# Altium PCB board_layout.PcbDoc
Units mil, origin at the board's own origin, x right, y up, seen from the top; angles counter-clockwise.
Board outline 2552.03 x 2874.03 mil, 2 copper layers (Top Layer, Bottom Layer); 11 components, 12 nets, 66 pads, 5 vias.
Unrouted connection lines stored in the file: 3.
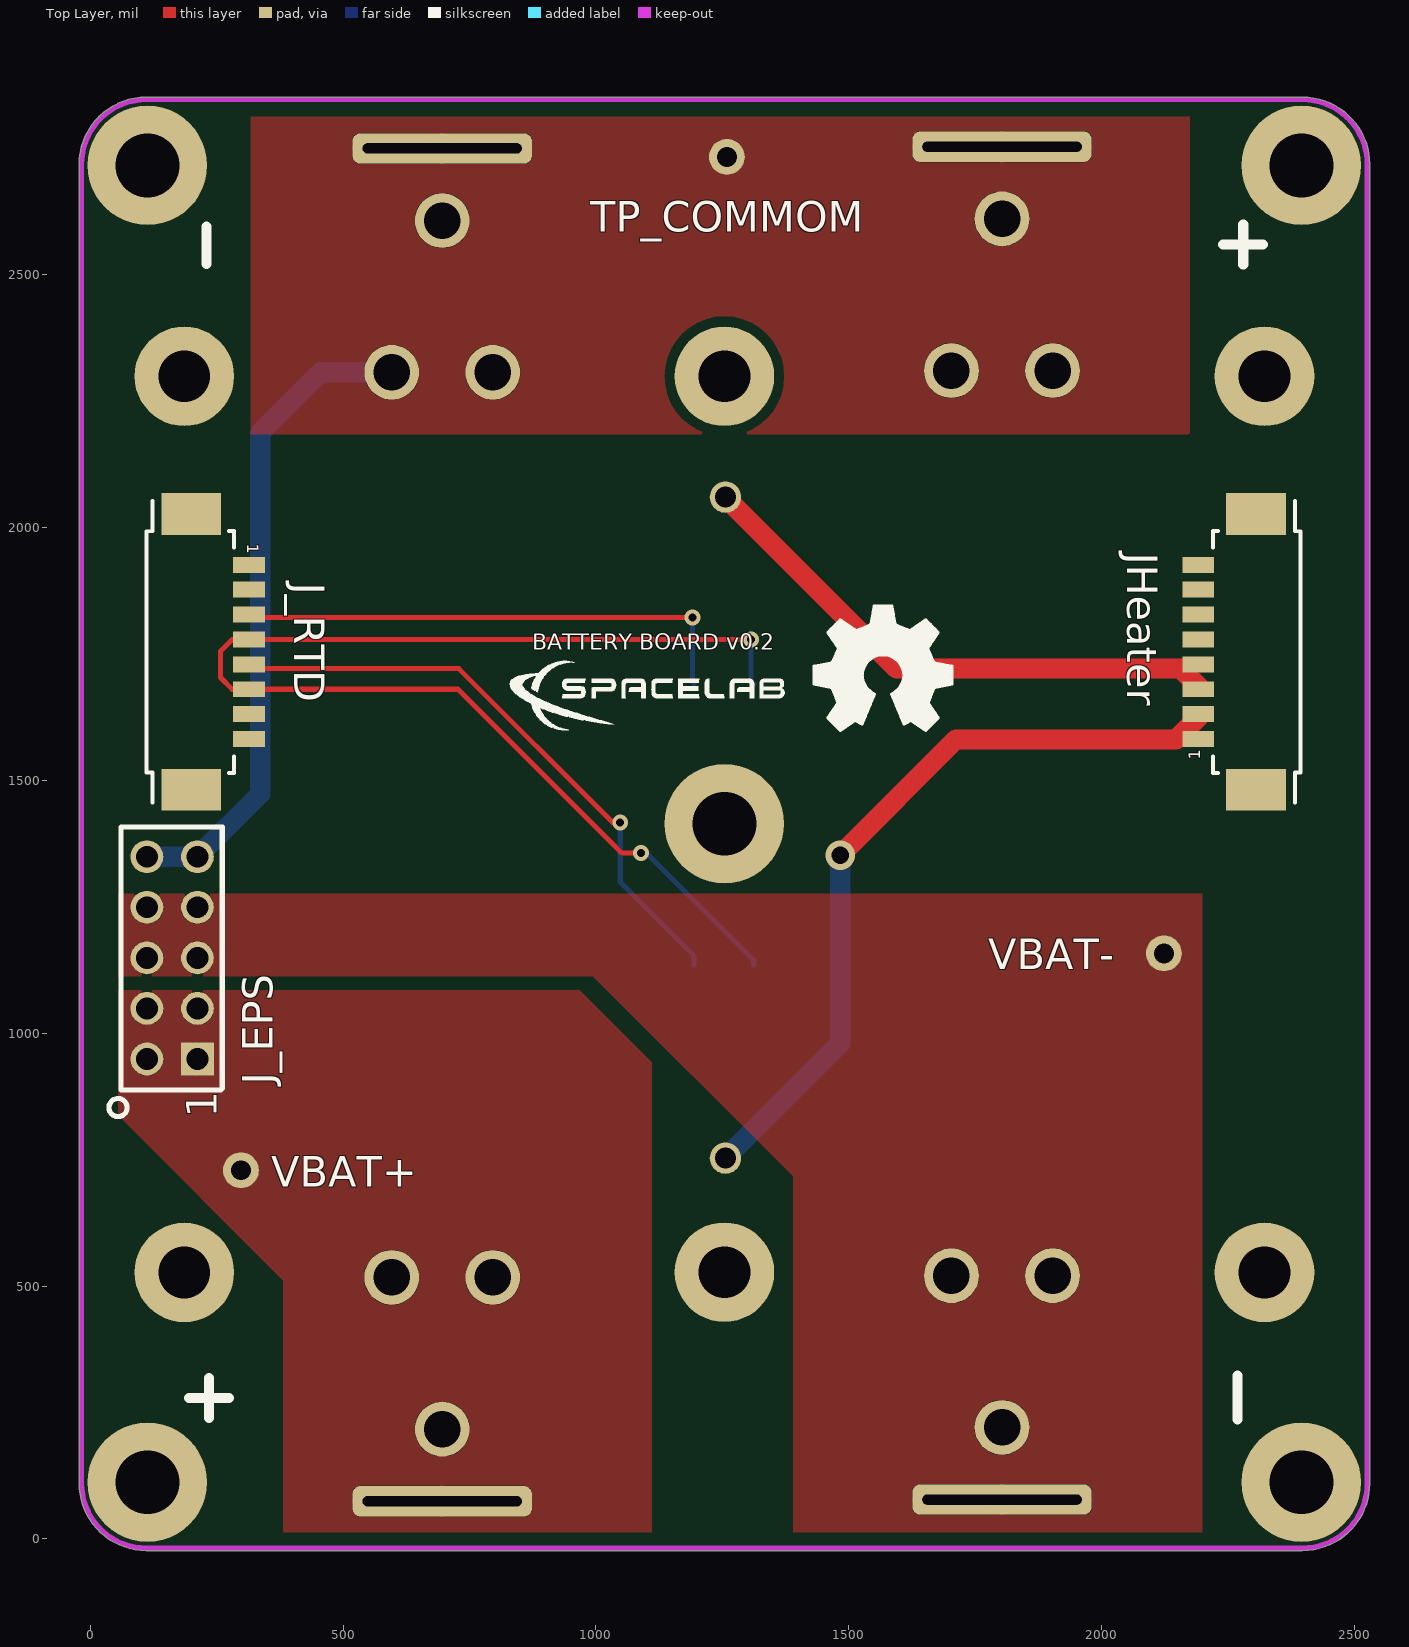
[diagram p0: Top Layer view]
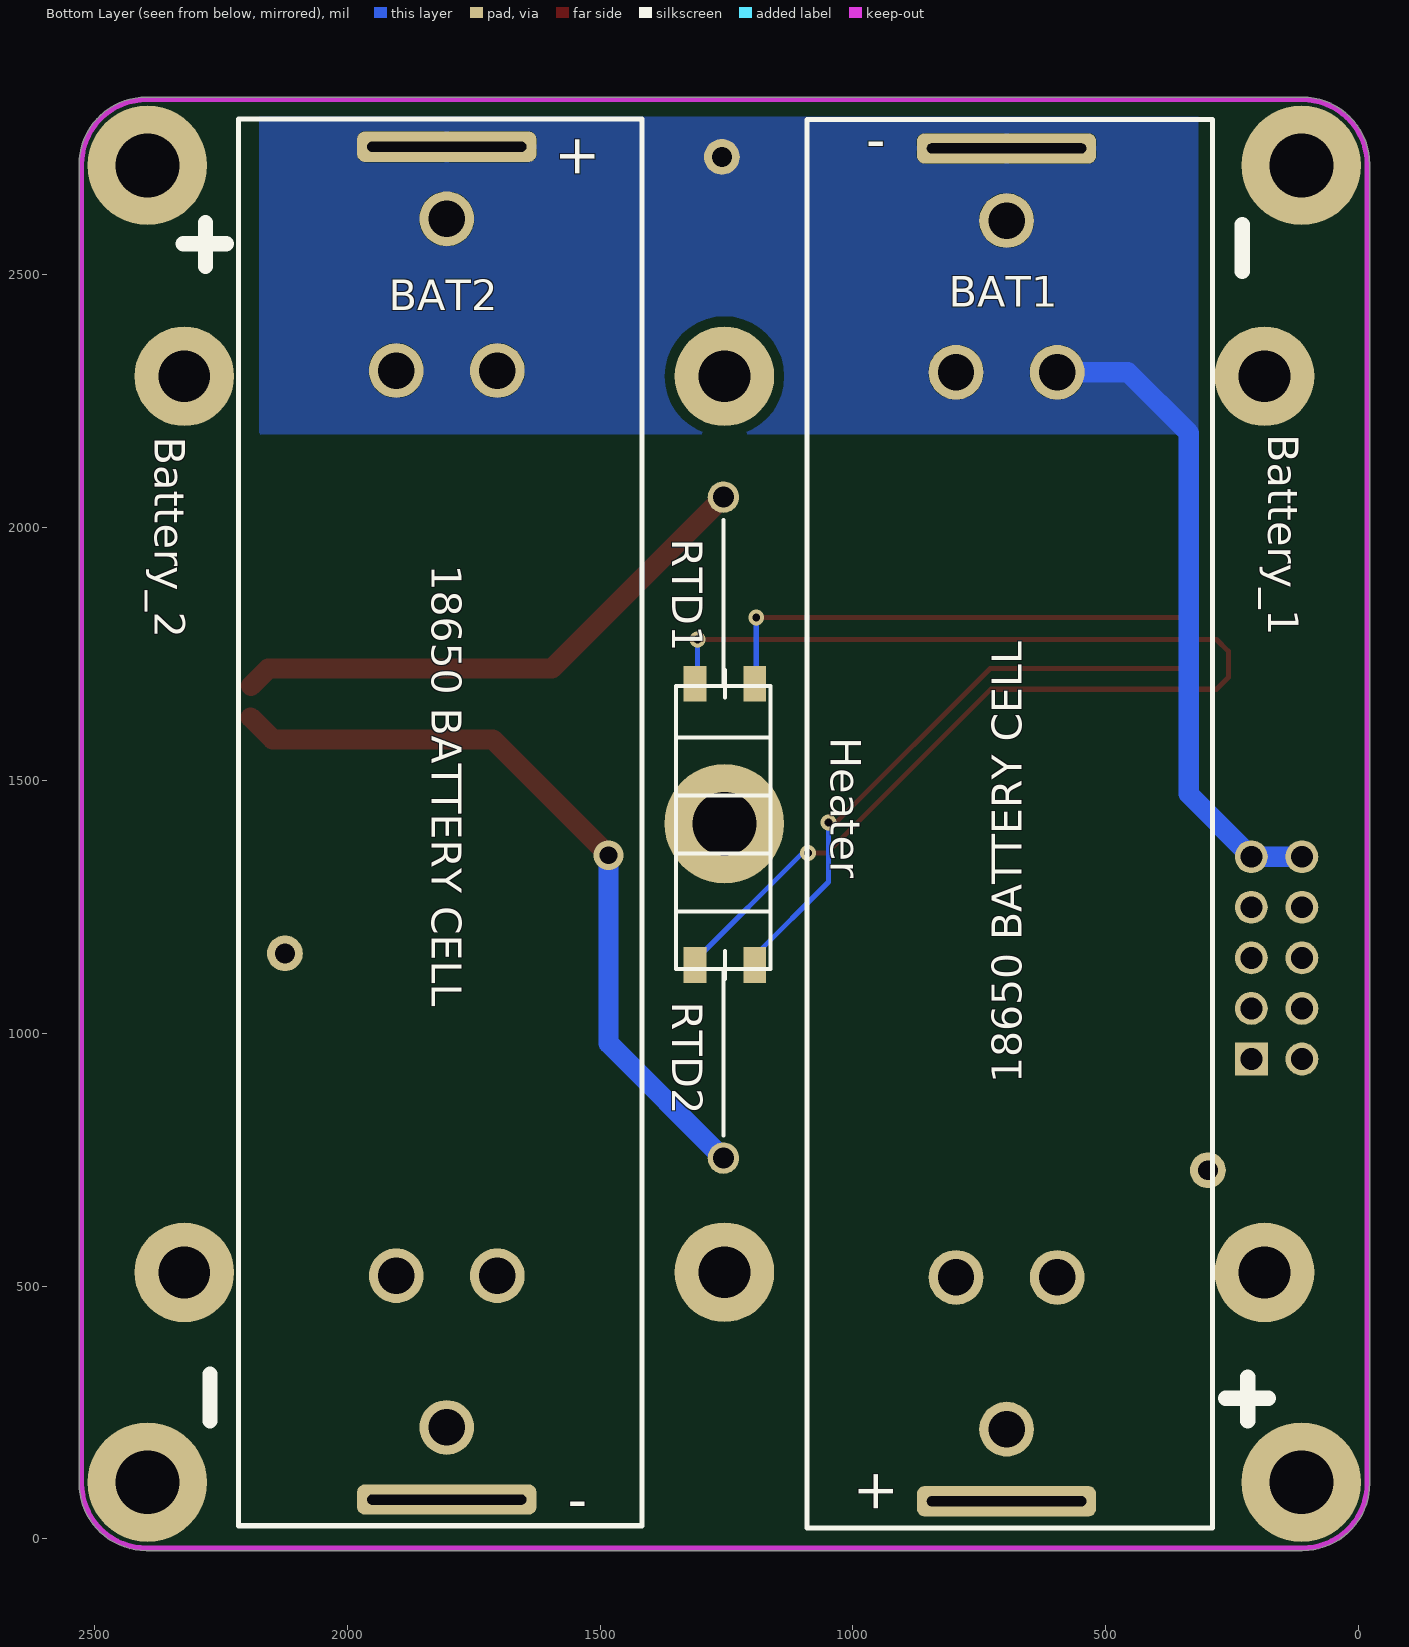
[diagram p1: Bottom Layer view, seen from below]

## Layer stack, top to bottom
Top Solder: solder mask 0.4, Solder Resist, Dk 3.5
Top Layer: signal copper 1.4
Dielectric 1: dielectric 12.6, FR-4, Dk 4.8
Bottom Layer: signal copper 1.4
Bottom Solder: solder mask 0.4, Solder Resist, Dk 3.5

## Board outline
-22.01,110 -22.01,110.03 -22.02,2718 cw(c-17,2718) -22.01,2718.03 cw(c111,2718) 111,2851.02 cw(c111,2846) 111.04,2851.01 2395,2851.02 cw(c2395,2846) 2396,2850.91 cw(c2397,2846) 2397,2851.02 cw(c2397,2718) 2530.02,2718 cw(c2525,2718) 2530.01,2717.97 2530.02,110 cw(c2397,110) 2397,-23.02 113,-23.02 cw(c113,-18) 112,-22.91 cw(c111,-18) 111,-23.02 cw(c111,110)

## Design rules (kind name [scope] priority, off if disabled: settings)
Clearance Clearance_1 [InNet('-1VBAT') vs InNet('-1VBAT')] p1: gap=0 ignorepadtopadclearanceinfootprint=FALSE
Clearance [All] p2: gap=20 ignorepadtopadclearanceinfootprint=FALSE except(0: Arc-Hole Track-Hole SMDPad-Hole THPad-Hole Via-Hole Fill-Hole Poly-Hole Region-Hole Text-Hole; 15.75: SMDPad-SMDPad)
HoleSize [All] p1: absolutevalues=TRUE maxlimit=125.98 minlimit=1 maxpercent=80.000 minpercent=20.000
PlaneConnect PlaneConnect_1 [InNet('-1VBAT')] p1: planeconnectstyle=Direct reliefexpansion=20 reliefentries=4 reliefconductorwidth=10 reliefairgap=10
PlaneConnect [All] p2: planeconnectstyle=Relief reliefexpansion=20 reliefentries=4 reliefconductorwidth=10 reliefairgap=10
PolygonConnect PolygonConnect_2 [InNet('-2VBAT') vs InNet('-2VBAT')] p1: connectstyle=Direct reliefconductorwidth=30 reliefentries=4 polygonreliefangle="90 Angle" airgapwidth=10
PolygonConnect PolygonConnect_1 [InNet('+1VBAT') vs InNet('+1VBAT')] p2: connectstyle=Direct reliefconductorwidth=30 reliefentries=4 polygonreliefangle="90 Angle" airgapwidth=10
PolygonConnect [InNet('-1VBAT') vs InNet('-1VBAT')] p3: connectstyle=Direct reliefconductorwidth=30 reliefentries=4 polygonreliefangle="90 Angle" airgapwidth=10
RoutingVias [All] p1: holewidth=28 width=50 viastyle="Through Hole" minholewidth=15.75 minwidth=50 maxholewidth=28 maxwidth=50
SolderMaskExpansion [All] p1: expansion=4
Width [All] p1: maxlimit=59.06 minlimit=10 preferedwidth=10 minimp=50.000000 maximp=50.000000 favimp=50.000000
28 further rules are at their usual default settings.

## Components (designator, comment, footprint, x,y, rotation, side; value= is the part's Value field where it differs from the comment)
BAT1 "18650 Battery contact strip slot" BATTERY_18650_STRIP_CONTACT 696,1413 r0 bottom
BAT2 "18650 Battery contact strip slot" BATTERY_18650_STRIP_CONTACT 1803,1414.43 r180 bottom
Heater "RS02B24R00FE12" RESAD3322W86L1422D475 1256,752.91 r90 bottom
J_EPS "67996-110HLF" HDRV10W64P254_2X5_1270X502X521P 212,949 r90 top
J_RTD "0532610871" "PICOBLADE 8PIN RIGHT ANGLE" 257,1754 r270 top
JHeater "0532610871" "PICOBLADE 8PIN RIGHT ANGLE" 2248,1754 r90 top
RTD1 "32207595" THRMC3216X70N 1253,1691 r0 bottom
RTD2 "32207595" THRMC3216X70N 1253,1135 r0 bottom
TP_COMMOM "TEST_POINT" Test_Point 1259,2733 r90 top (schematic designator TP_COMMOM?)
VBAT+ "TEST_POINT" Test_Point 298,729 r90 top
VBAT- "TEST_POINT" Test_Point 2123,1158 r90 top

## Footprints (in the part's own frame and the unit in brackets; to place one, negate y for a bottom-side part, rotate by r counter-clockwise, add the part's x,y. Pads: shape width x height; smd on the part's side, far side on the other; paste and mask are expansions set on the pad)
BATTERY_18650_STRIP_CONTACT [mm]
  round 2.75 hole 1.83: +(-2.54,22.755) +(0,30.375) +(2.54,22.755) -(-2.54,-22.705) -(0,-30.325) -(2.54,-22.705)
  rrect50% 9x1.524 hole 0.5 slot 8 at 0 deg: +(0,34) -(0,-33.95)
  body extent -9.5,-33.89 9.5,33.94, height 19.89
HDRV10W64P254_2X5_1270X502X521P [mm]
  rect 1.65x1.65 hole 1.1: 1(0,0)
  round 1.65 hole 1.1: 2(0,2.54) 3(2.54,0) 4(2.54,2.54) 5(5.08,0) 6(5.08,2.54) 7(7.62,0) 8(7.62,2.54) 9(10.16,0) 10(10.16,2.54)
  body extent -1.1,-1.17 11.6,3.66, height 8.28
"PICOBLADE 8PIN RIGHT ANGLE" [mm]
  rect 2.1x3 smd: 0(-6.925,-1.45) 0(6.925,-1.45)
  rect 0.8x1.6 smd: 1(-4.375,1.45) 2(-3.125,1.45) 3(-1.875,1.45) 4(-0.625,1.45) 5(0.625,1.45) 6(1.875,1.45) 7(3.125,1.45) 8(4.375,1.45)
  silkscreen extent -7.57,-3.7 7.57,0.7, body extent -7.57,-3.6 7.57,1.6, height 3.5
RESAD3322W86L1422D475 [mm]
  round 1.575 hole 1.05: 1(0,0) 2(33.2,0)
  silkscreen extent 1.14,-2.37 32.06,2.37, body extent -0.43,-2.77 33.65,2.77, height 7.04
Test_Point [mm]
  round 1.8 hole 1: 1(0,0)
THRMC3216X70N [mm]
  rect 1.15x1.8 smd: 1(-1.5,0) 2(1.5,0)
  silkscreen extent 0,-0.7 0,0.7, body extent -1.6,-0.8 1.6,0.8, height 0.7

## Part data
BAT1 BAT2: library part 18650_Battery_contact_strip_slot, "Slot using stip contact for 18650 batterie"
Heater: "Wirewound Resistors - Through Hole 3watts 24ohms 1%", Manufacturer_Name=Vishay, Power Rating=3W, Resistance=24R, Temperature Coefficient="20ppm/ °C", Arrow Part Number=RS02B24R00FE12, Datasheet Link=https://www.vishay.com/docs/30204/rsns.pdf, Manufacturer_Part_Number=RS02B24R00FE12, Partnumber=RS02B24R00FE12
J_EPS: "Headers & Wire Housings 2X5P UNSHRD HDR 30 microinch gold", Manufacturer_Name=SAMTEC, Mouser Part Number=649-67996-110HLF, Height=5.84mm, Manufacturer_Part_Number=67996-110HLF, Mouser Price/Stock=https://br.mouser.com/ProductDetail/?qs=zh4O8xspOuxgf2RA9jR3ZQ%3D%3D, Partnumber=67996-110HLF
J_RTD JHeater: "PicoBlade 8 Position Right Angle Connector Header Surface Mount 0.049\" (1.25mm)", Color=Beige, Contact Resistance=20mR, Current Rating=1A, Flammability Rating="UL94 V-0", Insulation Resistance=100MR, Manufacturer=Molex, Manufacturer Part Number=53261-0871, Max Operating Temperature=85°C, Min Operating Temperature=-40°C, Package Quantity=1000, Supplier Part Number 1=538-53261-0871, Voltage Rating=125V, ComponentLink1Description=http://uk.rs-online.com/webdocs/13c4/0900766b813c44c3.pdf?src-supplier=RSComponents, ComponentLink1URL=http://uk.rs-online.com/webdocs/13c4/0900766b813c44c3.pdf?src-supplier=RSComponents, ComponentLink2Description=http://www.farnell.com/datasheets/1632136.pdf?src-supplier=Element14, ComponentLink2URL=http://www.farnell.com/datasheets/1632136.pdf?src-supplier=Element14, ComponentLink3Description=http://www.farnell.com/datasheets/1862905.pdf?src-supplier=Element14, ComponentLink3URL=http://www.farnell.com/datasheets/1862905.pdf?src-supplier=Element14, ComponentLink4Description=http://www.onlinecomponents.com/productFiles/mf-MOL/0532610871_pcb_headers.pdf?src-supplier=Onlinecomponents.com, ComponentLink4URL=http://www.onlinecomponents.com/productFiles/mf-MOL/0532610871_pcb_headers.pdf?src-supplier=Onlinecomponents.com, ComponentLink5Description=http://www.jameco.com/Jameco/Products/ProdDS/1932580.pdf?src-supplier=Jameco, ComponentLink5URL=http://www.jameco.com/Jameco/Products/ProdDS/1932580.pdf?src-supplier=Jameco, ComponentLink6Description=https://www.distrelec.biz/Web/Downloads/74/_e/gh116861-116874_e.pdf?mime=application%2Fpdf&src-supplier=Distrelec, ComponentLink6URL=https://www.distrelec.biz/Web/Downloads/74/_e/gh116861-116874_e.pdf?mime=application%2Fpdf&src-supplier=Distrelec, ComponentLink7Description=http://www.mouser.com/ds/2/276/0532610871_PCB_HEADERS-171054.pdf?src-supplier=Mouser, ComponentLink7URL=http://www.mouser.com/ds/2/276/0532610871_PCB_HEADERS-171054.pdf?src-supplier=Mouser, ComponentLink8Description=http://www.molex.com/webdocs/datasheets/pdf/en-us/0532610871_PCB_HEADERS.pdf?src-supplier=Avnet+Europe, ComponentLink8URL=http://www.molex.com/webdocs/datasheets/pdf/en-us/0532610871_PCB_HEADERS.pdf?src-supplier=Avnet+Europe, ComponentLink9Description=http://www.farnell.com/datasheets/1841157.pdf?src-supplier=Farnell, ComponentLink9URL=http://www.farnell.com/datasheets/1841157.pdf?src-supplier=Farnell, ComponentLink10Description=http://www.molex.com/webdocs/datasheets/pdf/en-us/0532610871_PCB_HEADERS.pdf?src-supplier=Avnet, ComponentLink10URL=http://www.molex.com/webdocs/datasheets/pdf/en-us/0532610871_PCB_HEADERS.pdf?src-supplier=Avnet, Contact Material=Bronze,Brass,Tin, Contact Plating=Tin, Gender=Male, Glow Wire Compliant=Non-compliant, Housing Material=Thermoplastic, LatestRevisionDate=17-Jul-2002, LatestRevisionNote="Re-released for DXP Platform.", Lead Free="Lead Free", Lead Pitch=1.25mm, Mount="Surface Mount", Number of Circuits=8, Number of Contacts=8, Number of Positions=8, Number of Rows=1, Orientation="Right Angle", Packaging="Tape and Reel", Partnumber=53261-0871, Pitch=1.25mm, Pricing 1="1=1.31, 10=1.15, 100=0.991, 500=0.832, 1000=0.42, 2000=0.367 (USD)", Pricing 2="1=1.64, 10=1.487, 100=1.2749, 500=1.0624 (USD)", Publisher="Altium Limited", Radiation Hardening=No, REACH SVHC=Unknown, Stock 1=13055, Stock 2=24265, Supplier 1=Mouser, Supplier 2=Digi-Key, Supplier Part Number 2=WM7626CT-ND, Termination=Solder, Voltage Rating (AC)=125V, Voltage Rating (DC)=125V, Working Voltage=125V
RTD1 RTD2: "1 kOhms RTD Platinum (Pt) ±0.3% 3850ppm/°C 1206 (3216 Metric)", Manufacturer_Name="Heraeus Nexensos", Mouser Part Number=956-32207595, Arrow Part Number=32207595, Datasheet Link=https://componentsearchengine.com/Datasheets/1/32207595.pdf, Height=0.7mm, Manufacturer_Part_Number=32207595, Mouser Price/Stock=https://www.mouser.co.uk/ProductDetail/Heraeus-Nexensos/32207595?qs=MQgg6%252BVqoaPj6oznJNIlwg%3D%3D, Partnumber=32207595
TP_COMMOM VBAT+ VBAT-: "Test Point"

## Free pads (board coordinates)
  round 236.22 hole 125.98: 0(113,112) 0(113,2716) 0(1254,1414.43) 0(2395,112) 0(2395,2716)
  round 196.85 hole 102.36: 0(186,527) 0(186,2299) 0(1254,527.35) 0(1254,2299) 0(2322,527) 0(2322,2299)

## Via types
v1: diameter 31.5, hole 15.75, Top Layer to Bottom Layer, tented both sides, 4 vias
v2: diameter 59.06, hole 35.43, Top Layer to Bottom Layer, tented both sides, 1 vias

## Nets (pads, with @x,y where several pads share a name; then routed paths per layer and width w, separated by ;. In a path a pad name is that pad's centre, name@x,y a point inside that pad or via, vN(x,y) a via of type N, cw(c..) or ccw(c..) an arc to the next point about the centre after c; other vN are vias at no path point)
+VBat: BAT1.+ J_EPS.1 J_EPS.2 J_EPS.3 J_EPS.4 VBAT+.1
-Heater1_Voltage: Heater.1 JHeater.1 JHeater.2 | length 1513.9
  Top Layer w40: v2(1483,1352) 1712,1581 2147.48,1581 JHeater.2@2190.91,1624.43
  Bottom Layer w40: Heater.1 1483,979.91 v2(1483,1352)
-Heater2_Voltage: JHeater.5 JHeater.6
-VBat: BAT2.- J_EPS.5 J_EPS.6 J_EPS.7 J_EPS.8 VBAT-.1
BAT_GPIO1: J_RTD.8
BAT_GPIO2: J_RTD.7
RTD2: J_RTD.3 RTD1.1 | length 989.5
  Top Layer w10: J_RTD.3@336.09,1827.82 341.91,1822 v1(1191,1822)
  Bottom Layer w10: v1(1191,1822) 1191,1693.94 RTD1.1
RTD3: J_RTD.5 RTD2.1 | length 1183.8
  Top Layer w10: J_RTD.5@336.09,1729.39 344.55,1720.93 728.87,1720.93 1032.8,1417 v1(1048,1417)
  Bottom Layer w10: v1(1048,1417) 1048,1299 1193.94,1153.06 RTD2.1
RTD6: J_RTD.1
RTD_common: J_RTD.4 J_RTD.6 RTD1.2 RTD2.2 | length 2501
  Top Layer w10: v1(1089,1356) 1051.37,1356 727.19,1680.18 J_RTD.6 280.7,1680.18 257.59,1703.29 257.59,1755.5 280.7,1778.61 J_RTD.4 v1(1307,1778.61) v1@1312,1778.61
  Bottom Layer w10: v1(1089,1356) 1100,1356 1312.06,1143.94 RTD2.2 ; v1(1307,1778.61) 1307,1696.06 RTD1.2
VBat_Common: BAT1.- BAT2.+ J_EPS.9 J_EPS.10 TP_COMMOM.1 | length 1299
  Bottom Layer w40: J_EPS.10 J_EPS.9 336,1473 336,2187 455.9,2306.9 BAT1.-@596,2306.9
VBus: Heater.2 JHeater.3 JHeater.4 JHeater.7 JHeater.8 | length 1088.3
  Top Layer w40: Heater.2 1595,1721 2156,1721 JHeater.3@2189.87,1687.13
pads on no net: J_RTD.0 J_RTD.2 JHeater.0

## Polygon pours and split planes (outlines as drawn)
-VBat on Top Layer "2Vbat" (solid, pour order 6): 55,1113 994,1113 1390,717 1390,13 2199,13 2199,1276 55,1276
+VBat on Top Layer "+1Vbat" (solid, pour order 10): 253,1085 55,1085 55,838 382,511 382,13 1110,13 1110,943 968,1085
VBat_Common on Top Layer "A-GND" (solid, pour order 2): 2174,2183.52 2174,2812 317,2812 317,2184.52
VBat_Common on Bottom Layer "A-GND" (solid, pour order 12): 2174,2183.52 2174,2812 317,2812 317,2184.52

## Keep-outs
Keep-Out Layer:
  lines w10: 111,-18 cw(c111,110) -17,110 -17,2718 cw(c111,2718) 111,2846 2395,2846 ; 113,-18 2397,-18 ccw(c2397,110) 2525,110 2525,2718 ccw(c2397,2718) 2397,2846

## Silkscreen, mask and mechanical layers (free items; w line width, h text height)
Top Overlay:
  drawing of 992 lines, arcs and shapes, not listed
  text "BATTERY BOARD v0.2" at 873.63,1758.15 h32
Bottom Overlay:
  lines w10: 2212,2808 2215,2808 2215,26 1417,26 1417,2808 2213.5,2808 ; 2280,2516 2282,2516 ; 289,22 289,2807 1091,2807 1091,22 289,22 ; 2270,233 2271,233 2270,233
  lines w30: 178,278 263,278 ; 219,233 219,320 ; 230,2506 230,2599 ; 2239,2561 2324,2561 ; 2271,233 2271,326 ; 2280,2516 2280,2603
  text "Battery_1" at 179,2184 h60 r90
  text "Battery_2" at 2380,2179 h60 r90

## Text inside footprints (layer, text, board x,y; h text height)
BAT1: Mechanical 15 "+" at 920.41,48.83 h78.74 r270; Mechanical 15 "-" at 935.17,2788.98 h78.74 r180; Bottom Overlay "-" at 935.17,2788.98 h78.74 r180; Bottom Overlay "+" at 920.41,48.83 h78.74 r270; Bottom Overlay "18650 BATTERY CELL" at 666.47,901.19 h59.06 r270
BAT2: Mechanical 15 "-" at 1563.83,38.45 h78.74; Mechanical 15 "+" at 1578.59,2778.61 h78.74 r90; Bottom Overlay "18650 BATTERY CELL" at 1832.53,1926.24 h59.06 r90; Bottom Overlay "+" at 1578.59,2778.61 h78.74 r90; Bottom Overlay "-" at 1563.83,38.45 h78.74
J_EPS: Top Overlay "1" at 250,833 h60 r90
J_RTD: Top Overlay "1" at 302.28,1967.58 h39.37 r270
JHeater: Top Overlay "1" at 2202.72,1540.42 h39.37 r90